# Altium PCB Suspension.PcbDoc
Units mm, origin at the board's own origin, x right, y up, seen from the top; angles counter-clockwise.
Board outline 64 x 76 mm, 2 copper layers (Top Layer, Bottom Layer); 21 components, 13 nets, 61 pads, 0 vias.
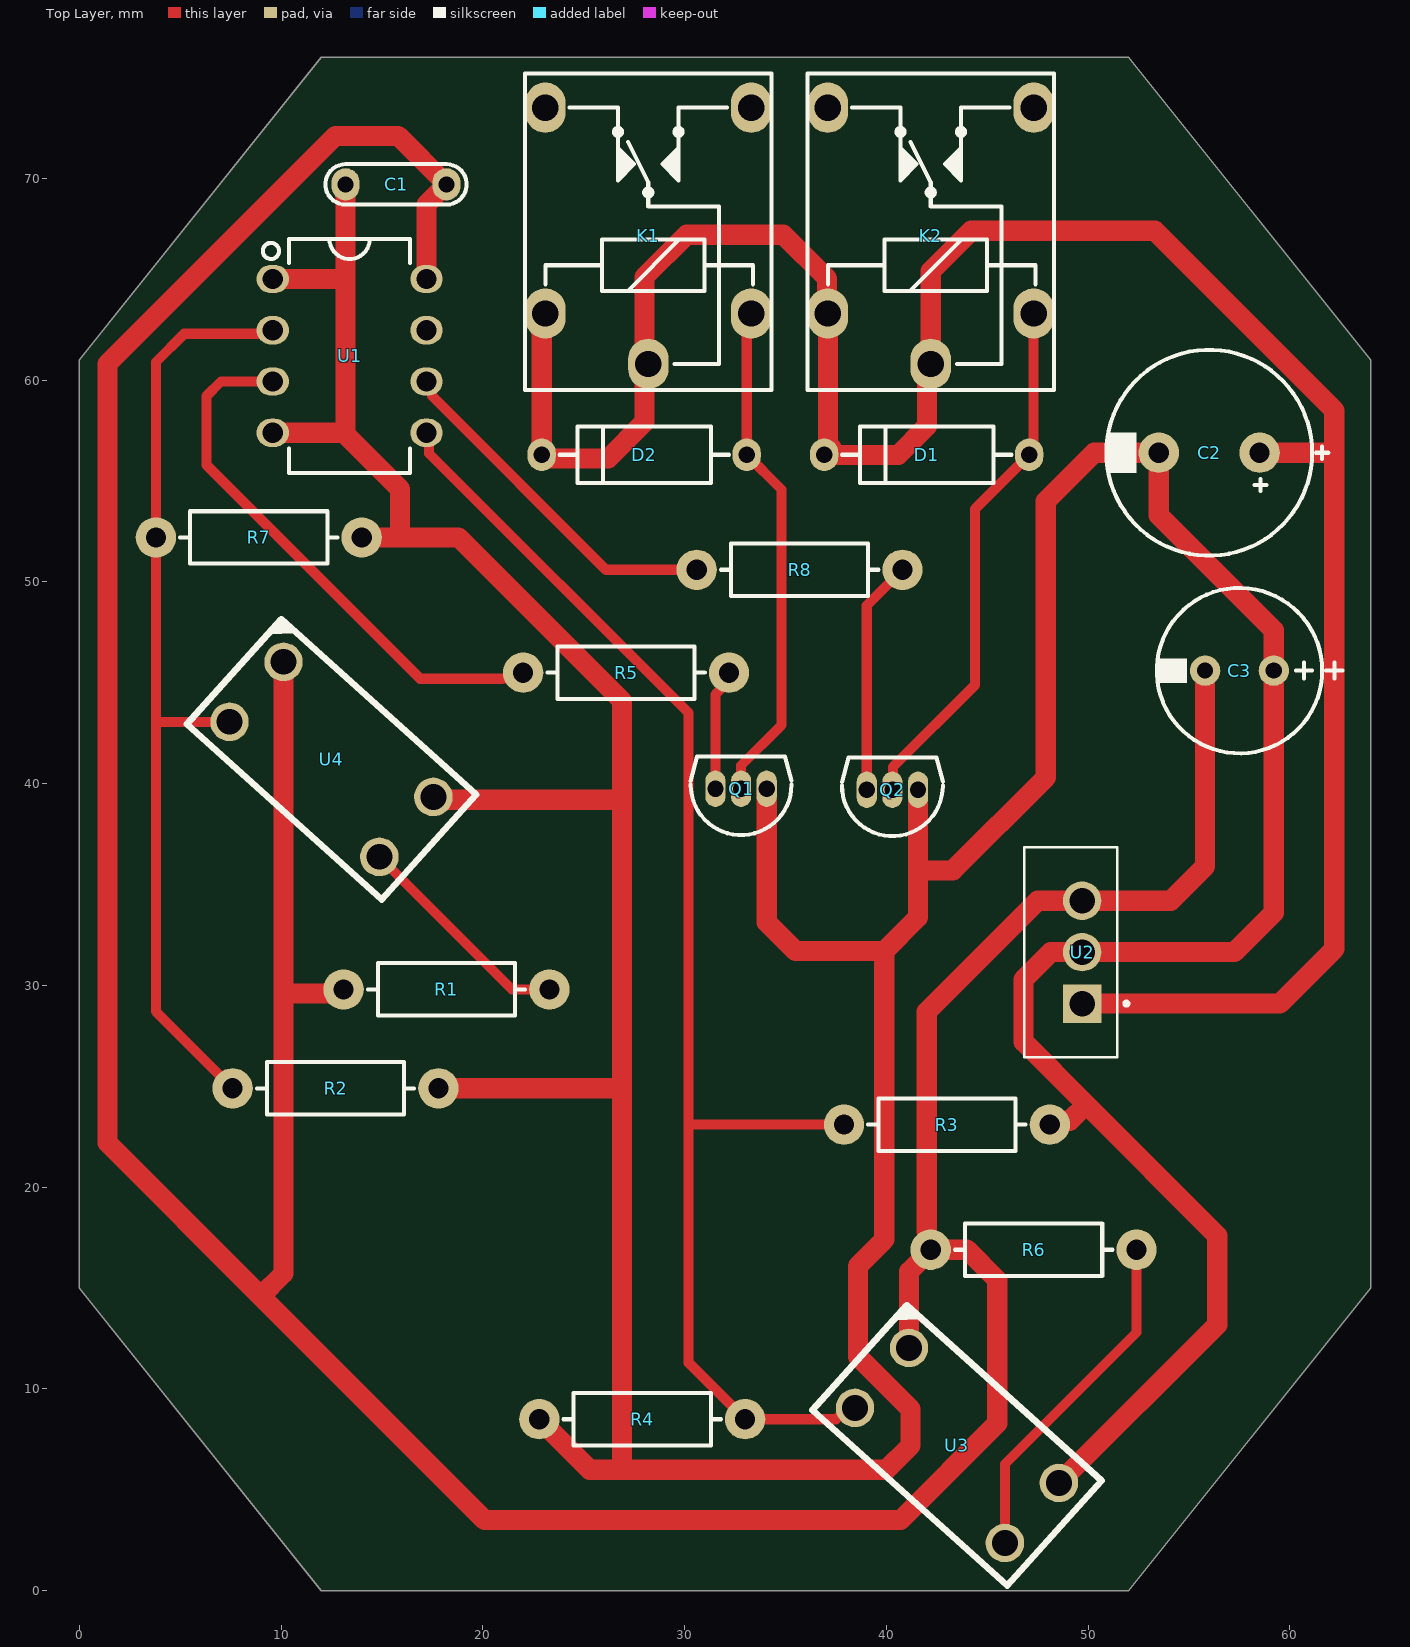
[diagram p0: Top Layer view]
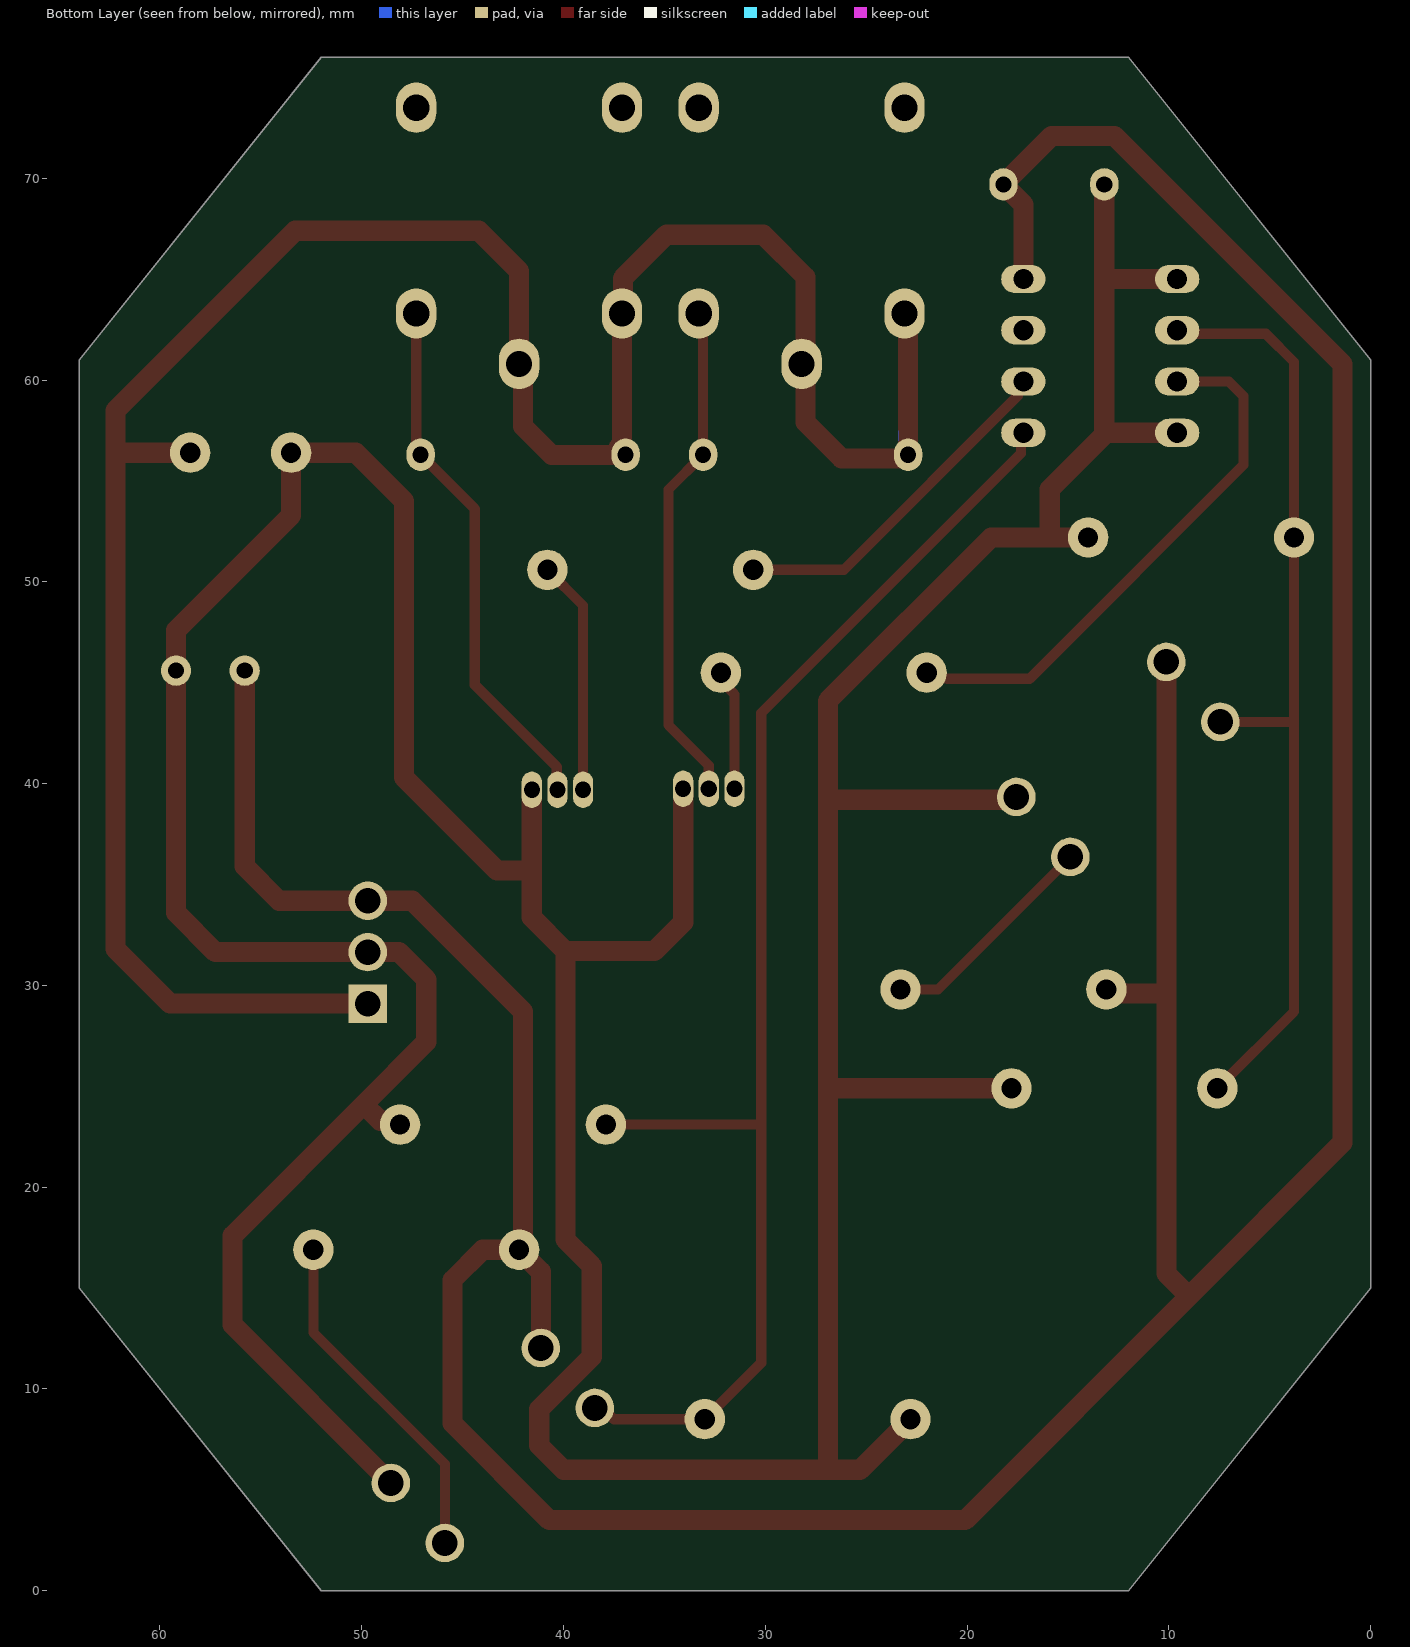
[diagram p1: Bottom Layer view, seen from below]
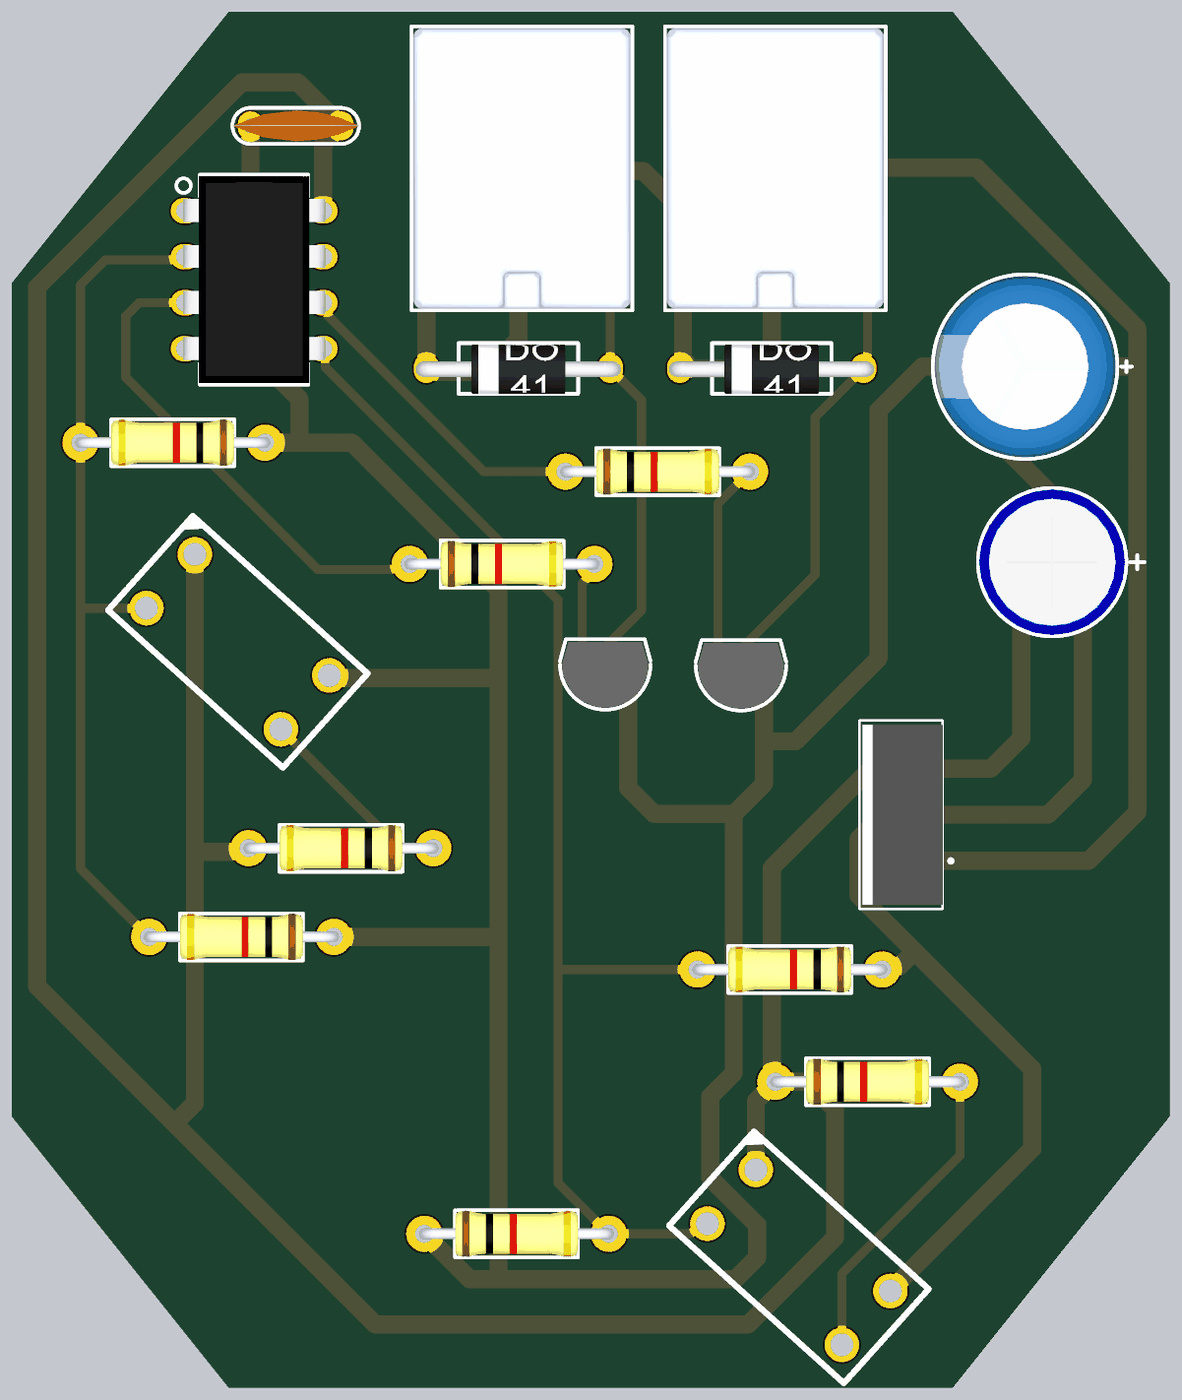
[diagram p2: 3D render of the assembled board from above, using the file's embedded part models]

## Layer stack, top to bottom
Top Solder: solder mask 0.0102, Solder Resist, Dk 3.5
Top Layer: signal copper 0.0356
Dielectric 1: dielectric 0.32, FR-4, Dk 4.8
Bottom Layer: signal copper 0.0356
Bottom Solder: solder mask 0.0102, Solder Resist, Dk 3.5

## Board outline
12,0 0,15 0,61 12,76 52,76 64,61 64,15 52,0

## Design rules (kind name [scope] priority, off if disabled: settings)
Clearance [All] p1: gap=0.2 ignorepadtopadclearanceinfootprint=FALSE
DiffPairsRouting [All] p1: maxlimit=0.254 minlimit=0.2 mostfreqgap=0.2 toplayer_minwidth=0.15 toplayer_maxwidth=10 toplayer_prefwidth=0.15 bottomlayer_minwidth=0.15 bottomlayer_maxwidth=10 bottomlayer_prefwidth=0.15 maxuncoupledlength=12.7
HoleSize [All] p1: absolutevalues=TRUE maxlimit=10 minlimit=0.5 maxpercent=80.000 minpercent=20.000
HoleToHoleClearance [All] p1: gap=0.3 allowstackedmicrovias=TRUE
PlaneClearance [All] p1: clearance=0.3
PlaneConnect [All] p1: planeconnectstyle=Relief reliefexpansion=0.5 reliefentries=4 reliefconductorwidth=0.4 reliefairgap=0.3
PolygonConnect PolygonConnect_Via [All vs IsVia] p1: connectstyle=Direct reliefconductorwidth=0.254 reliefentries=4 polygonreliefangle="90 Angle" airgapwidth=0.254
PolygonConnect PolygonConnect_Pad [All] p2: thpad.connectstyle=Relief thpad.reliefconductorwidth=0.4 thpad.reliefentries=4 thpad.polygonreliefangle="90 Angle" thpad.airgapwidth=0.3 smdpad.connectstyle=Direct smdpad.reliefconductorwidth=0.4 smdpad.reliefentries=4 smdpad.polygonreliefangle="90 Angle" smdpad.airgapwidth=0.3 via.connectstyle=Relief via.reliefconductorwidth=0.4 via.reliefentries=4 via.polygonreliefangle="90 Angle" via.airgapwidth=0.3
RoomDefinition Suspension [InComponentClass('Suspension')] p1: confinementstyle=ConfineIn formatcopy=TRUE lockcomponents=FALSE outline 153.5,-0.1 465.499,-0.1 465.499,26 153.5,26
RoutingVias [All] p1: holewidth=0.3 width=0.5 viastyle="Through Hole" minholewidth=0.3 minwidth=0.5 maxholewidth=0.3 maxwidth=0.5
SolderMaskExpansion [All] p1: expansion=0.102 istentingtop=FALSE
Width [All] p1: maxlimit=10 minlimit=0.2 preferedwidth=0.2
25 further rules are at their usual default settings.

## Components (designator, comment, footprint, x,y, rotation, side; value= is the part's Value field where it differs from the comment)
C1 "330nF" C_CER_D7A 15.7,69.7 r0 top
C2 "4.7uF" C_EL_10X16 56,56.4 r180 top
C3 "330uF" C_EL_8X12 57.5,45.6 r180 top
D1 "1N4001" D_AX04_DO41 42,56.3 r180 top
D2 "1N4001" D_AX04_DO41 28,56.3 r180 top
K1 "RELAY_SPDT" REL_SPDT_5_1512 28.2,63.3 r180 top
K2 "RELAY_SPDT" REL_SPDT_5_1512 42.2,63.3 r180 top
Q1 "C945" TO92_3 32.8,39.75 r180 top
Q2 "C945" TO92_3 40.3,39.7 r180 top
R1 "330R" R025W_AX04 18.2,29.8 r180 top
R2 "330R" R025W_AX04 12.7,24.9 r180 top
R3 "330R" R025W_AX04 43,23.1 r180 top
R4 "330R" R025W_AX04 27.9,8.5 r0 top
R5 "1K" R025W_AX04 27.1,45.5 r0 top
R6 "10K" R025W_AX04 47.3,16.9 r0 top
R7 "10K" R025W_AX04 8.9,52.2 r180 top
R8 "1K" R025W_AX04 35.7,50.6 r0 top
U1 "ATTINY13" DIP_8 13.4,61.2 r0 top
U2 "L7805CV" TO255P1040X460X1968-3 49.7,29.1 r90 top
U3 "SENSOR" SENSOR 43.5,7.2 r318 top locked
U4 "SENSOR" SENSOR 12.5,41.2 r318 top locked

## Footprints (in the part's own frame and the unit in brackets; to place one, negate y for a bottom-side part, rotate by r counter-clockwise, add the part's x,y. Pads: shape width x height; smd on the part's side, far side on the other; paste and mask are expansions set on the pad)
C_CER_D7A [mm] "CAP, CER MULTILAYER, 7.0X1.7mm, pitch: 5.0mm"
  oval 1.4x1.6 hole 0.8 mask+0.075: 1(-2.5,0) 2(2.5,0)
  silkscreen extent -3.5,-1 3.5,1, body extent -3.5,-0.85 3.5,0.85
C_EL_8X12 [mm] "Cap Elec, D8.0X12.0H pitch: 3.5mm, RB.14/.26, RB.15/.32"
  round 1.5 hole 0.8: 1(-1.7,0) 2(1.7,0)
  silkscreen extent -5.1,-4.1 4.1,4.1, body extent -4.02,-4.03 4.03,4.03, height 2.98
C_EL_10X16 [mm] "Cap Elec, D10.0X16.0H pitch: 5.0mm"
  round 2 hole 1: 1(-2.5,0) 2(2.5,0)
  silkscreen extent -5.9,-5.1 5.1,5.1, body extent -5,-5 5,5, height 16
D_AX04_DO41 [mm] "DIODE 0.4 INCH SPACING DO-41"
  oval 1.4x1.6 hole 0.8: 1(-5.08,0) 2(5.08,0)
  silkscreen extent -4.2,-1.4 4.2,1.4, body extent -5.68,-1.32 5.68,1.4, height 2.85
DIP_8 [mm] "DIP, pitch 2.54mm, 300mil Width"
  oval 1.6x1.4 / inner round 1.4 / far side oval 2.2x1.4 hole 1: 1(-3.81,3.81) 2(-3.81,1.27) 3(-3.81,-1.27) 4(-3.81,-3.81) 5(3.81,-3.81) 6(3.81,-1.27) 7(3.81,1.27) 8(3.81,3.81)
  silkscreen extent -4.3,-5.8 3,5.8, body extent -3.94,-5.7 3.94,5.73, height 4.19
R025W_AX04 [mm] "RESISTOR 1/4 WATT, AXIAL0.4"
  round 2 hole 1: 1(-5.1,0) 2(5.1,0)
  silkscreen extent -3.9,-1.3 3.9,1.3, body extent -5.38,-1.28 5.38,1.28, height 2.6
REL_SPDT_5_1512 [mm] "RELAY, SPDT, 15.40x12.10x14.0mm, G8QN, SUN HOLD RAM"
  oval 2x2.5 hole 1.3: 1(0,2.5) 2(5.1,-10.2) 3(-5.1,-10.2) 4(-5.1,0) 5(5.1,0)
  silkscreen extent -6.1,-11.9 6.1,3.8, body extent -6,-11.8 6,3.7, height 14
SENSOR [mm]
  round 1.91 hole 1.27: 1(-5,2) 2(-5,-2) 3(5,2) 4(5,-2)
  silkscreen extent -6.5,-3.5 6.5,3.5
TO92_3 [mm] "TO-92, SOT54"
  oval 1x1.8 hole 0.8 mask+0.1: 1(-1.27,0) 2(0,0) 3(1.27,0)
  silkscreen extent -2.5,-1.59 2.5,2.3, body extent -2.38,-1.45 2.38,2.18, height 4.82
TO255P1040X460X1968-3 [mm]
  rect 1.91x1.91 hole 1.27: 1(0,0)
  round 1.91 hole 1.27: 2(2.55,0) 3(5.1,0)
  silkscreen extent -2.65,-2.29 7.75,2.86, body extent -2.43,-1.76 7.53,2.69, height 19.68

## Part data
C1: library part CAP_THD_CERML, "CAP, THD, CER MULTI LAYER,", ASSEMBLY=ASSEMBLY, DESC="CAP, CER MULTI LAYER,", MANF=MANF, MANF_P#=MANF_PART#, PARAM=50V, PARAM2=PARAM2, PRICE="100= 1$"
C2: library part CAP_THD_EL_4.7u400V, "CAP, ELEC", MANF=MANF, MANF_P#=MANF_PART#, PARAM=400V, PARAM2=PARAM2
C3: library part CAP_THD_EL_330u25V, "CAP, THD, ELEC, 330uF, 25V", ASSEMBLY=ASSEMBLY, DESC=DESCRIPTION, DIST#=MOUSER, MANF=PANASONIC, MANF_P#=EEE-1EA331UP, PARAM=25V, PARAM2=20%, PRICE="10= 5$"
D1 D2: library part DIODE_THD, "DIODE, THD", ASSEMBLY=ASSEMBLY, DESC=DESCRIPTION, MANF=MANF, MANF_P#=1N4001, PARAM=100V, PARAM2=1A, PRICE=PRICE
K1 K2: library part RELAY_SPST_5_1512_G8QN, "Relay, SPDT, 5P, 15.4X12.1mm, 16V/30A", MANF=OMRON, MANF_P#=G8QN, PARAM="12V, 50mA", PARAM2="16VDC, 30A", PRICE=PRICE
Q1 Q2: library part NPN_C945_TO92, "BJT, NPN, 50v, 0.15A, THD, TO92, BC945", MANF=-, MANF_P#="C945, 2SC945, BC945", PARAM="50v, 0.15A", PARAM2=250mW
R1 R2 R3 R4 R5 R6 R7 R8: library part RES_THD, "RESISTOR, THD", ASSEMBLY=ASSEMBLY, DESC=DESCRIPTION, DIST#=MOUSER, MANF="KOA SPEER", MANF_P#=RK73H1ETTP4701F, PARAM=0.063W, PARAM2=1%, PRICE="100= 0.5$"
U1: library part ATTINY13A_DIP8, "MCU, AVR, 8-Bit, 1KB, 64B RAM, 20MHz", MANF=ATMEL/MICROCHIP, MANF_P#=ATTINY13A-PU, PARAM="1KB, 64B RAM, -40~85°C", PARAM2=1.8~5.5V, PRICE=0.9$
U2: "Standard Regulator Pos 5V 1.5A 3-Pin(3+Tab) TO-220 Standard Regulator Pos 5V 1.5A 3-Pin(3+Tab) TO-220", Package=None, Availability=Unavailable, MP=L7805CV, PRICE=None

## Nets (pads, with @x,y where several pads share a name; then routed paths per layer and width w, separated by ;. In a path a pad name is that pad's centre, name@x,y a point inside that pad or via, vN(x,y) a via of type N, cw(c..) or ccw(c..) an arc to the next point about the centre after c; other vN are vias at no path point)
GND: C1.1 C2.2 C3.1 Q1.1 Q2.1 R2.1 R3.1 R4.1 R7.1 U1.1 U1.4 U2.2 U3.3 U4.3 | length 268.6
  Top Layer w1: U1.4 13.11,57.39 ; U1.1 13.01,65.01 13.2,65.2 ; C1.1 13.2,65.2 ; R7.1 15.607,52.2 ; U4.3 17.695,39.2 26.9,39.2 ; R2.1 26.7,24.9 26.9,25.1 ; R4.1 25.3,6 26.9,6 ; Q1.1@34.07,39.778 Q1.1 34.07,33.13 35.5,31.7 39.9,31.7 ; Q2.1 41.57,35.7 ; R3.1 48.291,23.291 49.091,23.291 49.9,24.1 ; U3.3 56.4,13.187 56.4,17.6 49.9,24.1 ; 13.11,57.39 15.9,54.6 15.9,52.493 15.607,52.2 ; 13.11,57.39 13.2,57.48 13.2,65.2 ; 15.607,52.2 18.8,52.2 26.9,44.1 26.9,39.2 ; 26.9,6 26.9,25.1 ; 26.9,6 40,6 41.2,7.2 41.2,9 38.6,11.6 38.6,16.1 39.9,17.4 39.9,31.7 ; 26.9,25.1 26.9,39.2 ; 39.9,31.7 41.57,33.37 41.57,35.7 ; 41.57,35.7 43.3,35.7 47.9,40.3 47.9,54 50.3,56.4 C2.2 53.5,53.3 59.2,47.6 C3.1 59.2,33.6 57.25,31.65 U2.2 48.15,31.65 46.8,30.3 46.8,27.2 49.9,24.1
NetD1_1: D1.1 K2.4 Q2.2 | length 26.8
  Top Layer w0.5: Q2.2 40.334,39.734 40.334,40.834 44.4,44.9 44.4,53.62 D1.1 47.08,56.644 47.3,56.864 K2.4 ; Q2.2@40.4,39.7 40.4,39.5 Q2.2@40.496,39.596
NetD2_1: D2.1 K1.4 Q1.2 | length 25.2
  Top Layer w0.5: Q1.2 32.8,40.9 34.8,42.9 34.8,54.58 D2.1 33.08,63.08 K1.4
NetQ1_3: Q1.3 R5.2 | length 6
  Top Layer w0.5: Q1.3 31.53,44.424 32.2,45.094 R5.2
NetQ2_3: Q2.3 R8.2 | length 11.6
  Top Layer w0.5: Q2.3 39.03,48.83 R8.2
NetR1_1: R1.1 U4.4 | length 11.1
  Top Layer w0.5: U4.4 21.446,29.8 R1.1
NetR6_2: R6.2 U3.4 | length 17.2
  Top Layer w0.5: U3.4 45.877,6.277 52.4,12.8 R6.2
RL_1: R5.1 U1.3 | length 27.2
  Top Layer w0.5: U1.3 7.03,59.93 6.3,59.2 6.3,55.8 16.9,45.2 20.957,45.2 20.97,45.213 22.073,45.213 R5.1@22.086,45.2
RL_2: R8.1 U1.6 | length 17.5
  Top Layer w0.5: U1.6 17.482,59.658 17.482,59.218 26.1,50.6 R8.1
SN_1: R2.2 R7.2 U1.2 U4.2 | length 47.7
  Top Layer w0.5: U4.2 3.8,43.059 ; R2.2 3.8,28.7 3.8,43.059 ; U1.2 9.418,62.298 5.198,62.298 3.8,60.9 R7.2 3.8,43.059
SN_2: R3.2 R4.2 U1.5 U3.2 | length 68.8
  Top Layer w0.5: U1.5 17.335,57.265 17.335,56.365 30.2,43.5 30.2,23.2 ; R3.2 30.3,23.1 30.2,23.2 ; U3.2 38.064,9.059 37.505,8.5 R4.2 30.2,11.3 30.2,23.2
VCC: C1.2 C3.2 R1.2 R6.1 U1.8 U2.3 U3.1 U4.1 | length 209.7
  Top Layer w1: U4.1 10.123,29.6 ; R1.2 12.909,29.609 12.202,29.609 12.193,29.6 10.123,29.6 ; U1.8 17.21,68.71 C1.2 15.8,72.1 12.7,72.1 1.4,60.8 1.4,22.2 9,14.6 ; U3.1 41.123,15.814 42.2,16.892 R6.1 ; C3.2 55.8,35.9 54.1,34.2 U2.3 47.5,34.2 42,28.7 42,17.807 42.009,17.798 42.009,17.091 R6.1 ; 9,14.6 20.1,3.5 40.7,3.5 45.5,8.3 45.5,15.4 44,16.9 R6.1 ; 9,14.6 10.123,15.723 10.123,29.6
VIn: C2.1 D1.2 D2.2 K1.1 K1.5 K2.1 K2.5 U2.1 | length 121.8
  Top Layer w0.5: D1.2@36.92,56.644 D1.2@37.1,56.824
  Top Layer w1: K1.5 22.92,63.12 D2.2 23.097,56.123 23.479,56.123 23.487,56.116 26.216,56.116 28.009,57.909 28.009,65.109 30.1,67.2 34.9,67.2 37.057,65.043 37.057,63.343 K2.5 D1.2@37.1,56.824 ; D1.2 D1.2@37.272,56.652 ; D1.2@37.105,56.287 40.587,56.287 42.009,57.709 42.009,60.088 42.2,60.279 42.2,65.4 44.2,67.4 53.3,67.4 62.2,58.5 62.2,56.4 ; U2.1 59.5,29.1 62.2,31.8 62.2,56.4 ; C2.1 62.2,56.4
pads on no net: K1.2 K1.3 K2.2 K2.3 U1.7

## Silkscreen, mask and mechanical layers (free items; w line width, h text height)
Mechanical 15:
  the board outline again, w0.3